# Altium PCB 红外发射.PcbDoc
Units mil, origin at the board's own origin, x right, y up, seen from the top; angles counter-clockwise.
Board outline 6000 x 4000 mil, 2 copper layers (Top Layer, Bottom Layer); 11 components, 11 nets, 33 pads, 1 vias.
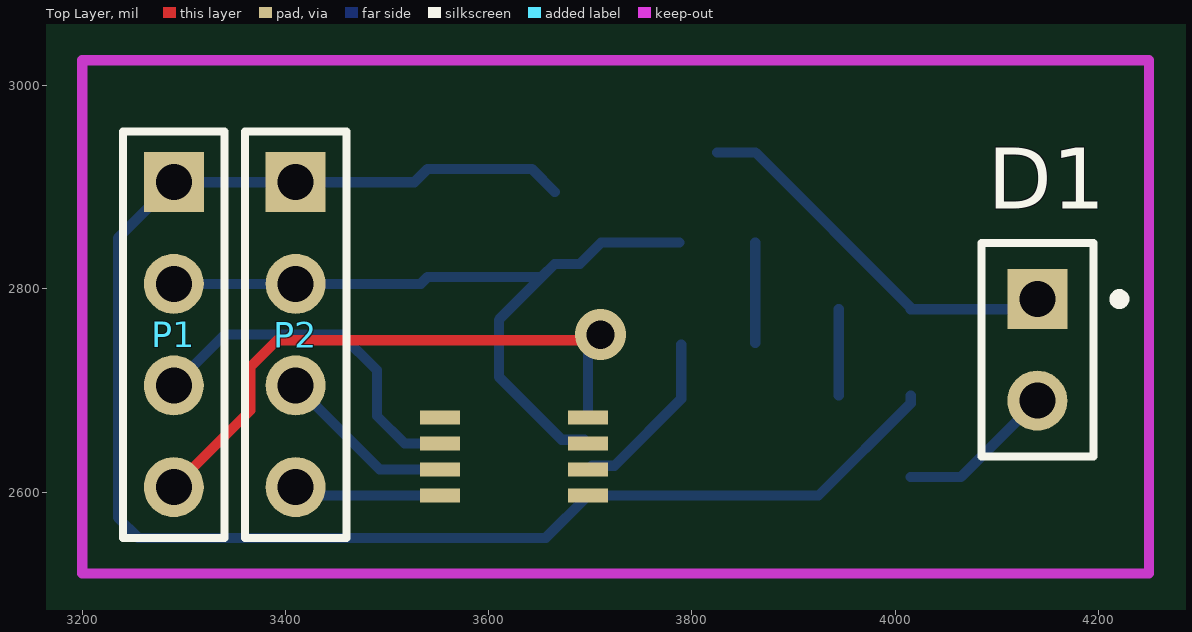
[diagram p0: Top Layer view]
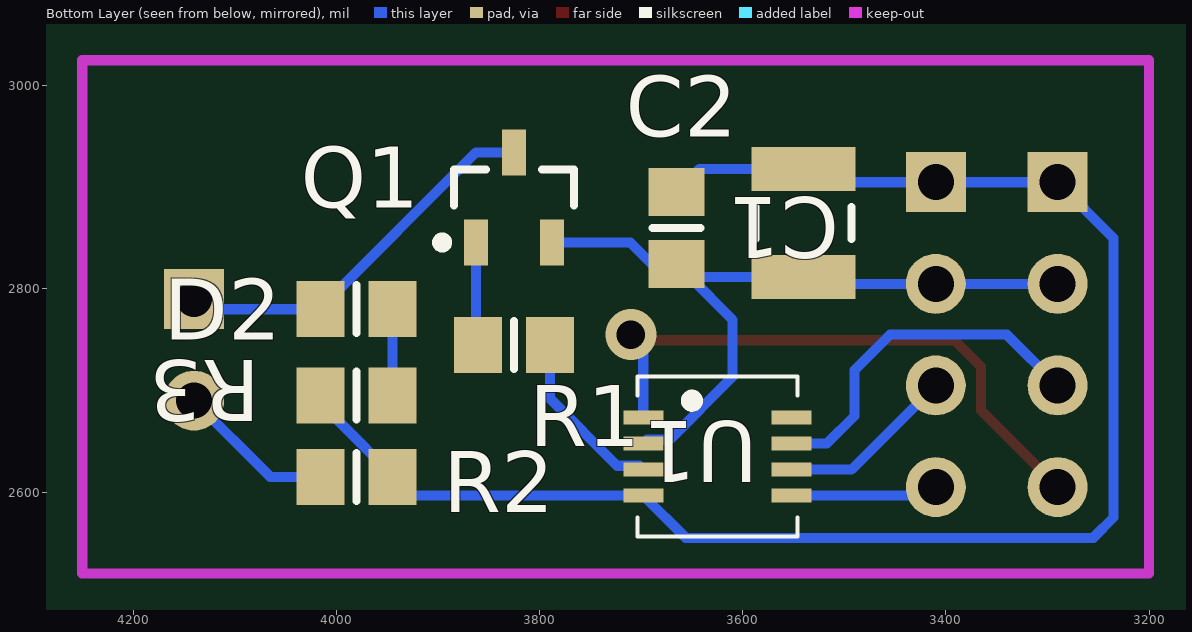
[diagram p1: Bottom Layer view, seen from below]

## Layer stack, top to bottom
Top Solder: solder mask 0.4, Solder Resist, Dk 3.5
Top Layer: signal copper 1.4
Dielectric 1: dielectric 12.6, FR-4, Dk 4.8
Bottom Layer: signal copper 1.4
Bottom Solder: solder mask 0.4, Solder Resist, Dk 3.5

## Board outline
1000,1000 7000,1000 7000,5000 1000,5000

## Design rules (kind name [scope] priority, off if disabled: settings)
Clearance [All] p1: gap=10
PolygonConnect [All] p1: connectstyle=Relief reliefconductorwidth=10 reliefentries=4 polygonreliefangle="90 Angle" airgapwidth=10
RoutingVias [All] p1: holewidth=28 width=50 viastyle="Through Hole" minholewidth=28 minwidth=50 maxholewidth=28 maxwidth=50
SolderMaskExpansion [All] p1: expansion=4
Width [All] p1: maxlimit=10 minlimit=10 preferedwidth=10
29 further rules are at their usual default settings.

## Components (designator, comment, footprint, x,y, rotation, side; value= is the part's Value field where it differs from the comment)
C1 "Cap2" C1210_L 3540,2865 r90 bottom
C2 "Cap" 6-0805_N 3665,2860 r270 bottom
D1 "IR" PIN2 4140,2790 r270 top
D2 "LED" 6-0805_N 3980,2780 r180 bottom
P1 "Header 4" HDR1X4 3290,2905 r270 top
P2 "Header 4" HDR1X4 3410,2905 r270 top
Q1 "8550" SOT-23_N 3825,2890 r90 bottom
R1 "Res1" 6-0805_N 3825,2745 r0 bottom
R2 "Res1" 6-0805_N 3980,2615 r180 bottom
R3 "Res1" 6-0805_N 3980,2695 r0 bottom
U1 "STC15F104W_SOP8" DFN8 3625,2635 r180 bottom

## Footprints (in the part's own frame and the unit in brackets; to place one, negate y for a bottom-side part, rotate by r counter-clockwise, add the part's x,y. Pads: shape width x height; smd on the part's side, far side on the other; paste and mask are expansions set on the pad)
6-0805_N [mm] "Chip Resistor, Body 2.0x1.2mm, IPC Medium Density"
  rect 1.2x1.4 smd: 1(-0.9,0) 2(0.9,0)
  silkscreen extent 0,-0.6 0,0.6, body extent -1.07,-0.7 1.07,0.7, height 0.7
C1210_L [mm] "Chip Capacitor, Body 3.2x2.5mm, IPC High Density"
  rect 1.1x2.6 smd: 1(-1.35,0) 2(1.35,0)
  silkscreen extent -0.4,-1.2 0.4,1.2, body extent -1.7,-1.35 1.7,1.35, height 1.5
DFN8 [mm]
  rect 1x0.35 all layers, no hole: 1(-1.85,0.975) 2(-1.85,0.325) 3(-1.85,-0.325) 4(-1.85,-0.975) 5(1.85,-0.975) 6(1.85,-0.325) 7(1.85,0.325) 8(1.85,0.975)
  silkscreen extent -2,-2 2,2
HDR1X4 [mm] "Connector; Header; 4 Position"
  rect 1.5x1.5 hole 0.9: 1(0,0)
  round 1.5 hole 0.9: 2(2.54,0) 3(5.08,0) 4(7.62,0)
  silkscreen extent -1.27,-1.27 8.89,1.27
PIN2 [mm] "Photosensitive Diode; 2 Leads"
  rect 1.5x1.5 hole 0.9: 1(0,0)
  round 1.5 hole 0.9: 2(2.54,0)
  silkscreen extent -1.4,-1.4 3.94,2.18
SOT-23_N [mm] "SOT23, 3-Leads, Body 2.9x1.3mm, Pitch 0.95mm, Lead Span 2.5mm, IPC Medium Density"
  rect 1.15x0.6 smd: 1(-1.125,0.95) 2(-1.125,-0.95) 3(1.125,0)
  silkscreen extent -1.25,-1.5 0.7,1.93, body extent -0.7,-1.5 0.7,1.5, height 1.1

## Part data
C1 C2: "Capacitor"
D1 D2: library part LED0, "Typical INFRARED GaAs LED"
P1 P2: "Header, 4-Pin"
Q1: library part 2N3906, "PNP General Purpose Amplifier"
R1 R2 R3: "Resistor"
U1: library part STC15F101W_SOP8_DIP8

## Via types
v1: diameter 50, hole 28, Top Layer to Bottom Layer, 1 vias

## Nets (pads, with @x,y where several pads share a name; then routed paths per layer and width w, separated by ;. In a path a pad name is that pad's centre, name@x,y a point inside that pad or via, vN(x,y) a via of type N, cw(c..) or ccw(c..) an arc to the next point about the centre after c; other vN are vias at no path point)
GND: C1.2 C2.1 P1.1 P2.1 R2.2 R3.2 U1.4 | length 1593.8
  Bottom Layer w10: C2.1 3642.28,2918.15 C1.2 3526.85,2905 P2.1 P1.1 3235,2850 3235,2575 3255,2555 3656.22,2555 U1.4 3924.65,2596.61 4015.43,2687.39 R3.2
IN1: P2.4 U1.5 | length 133.8
  Bottom Layer w10: P2.4@3418.39,2596.61 U1.5
IN2: P1.3 U1.7 | length 353.6
  Bottom Layer w10: P1.3 3340,2755 3455,2755 3490,2720 3490,2675 3517.2,2647.8 U1.7
IN3: P1.4 U1.1 | length 578.9
  Top Layer w10: P1.4 3365.47,2680.47 3365.47,2723.44 3391.56,2749.53 3704.53,2749.53 v1(3710,2755)
  Bottom Layer w10: U1.1 v1@3697.83,2745
IN4: P2.3 U1.6 | length 176.5
  Bottom Layer w10: P2.3 3492.8,2622.2 U1.6
NetD1_1: D1.1 D2.1 Q1.3 | length 383.9
  Bottom Layer w10: Q1.3 3862.67,2934.29 4015.43,2781.53 D2.1 4130,2780 D1.1
NetD1_2: D1.2 R2.1 | length 155.6
  Bottom Layer w10: R2.1 4065,2615 D1.2
NetD2_2: D2.2 R3.1 | length 85
  Bottom Layer w10: R3.1 D2.2
NetQ1_2: Q1.1 R1.2 | length 98.7
  Bottom Layer w10: R1.2@3862.4,2746.97 Q1.1
NetR1_1: R1.1 U1.3 | length 173.8
  Bottom Layer w10: U1.3 3701.54,2625.91 3723.73,2625.91 3789.57,2691.74 R1.1
VCC: C1.1 C2.2 P1.2 P2.2 Q1.2 U1.2 | length 745.4
  Bottom Layer w10: P1.2 P2.2 3533.15,2805 C1.1 C2.2@3652.28,2811.85 ; U1.2 3694.13,2651.5 3671.94,2651.5 3610,2713.43 3610,2769.57 C2.2@3652.28,2811.85 ; Q1.2 3710.71,2845.71 3689.57,2824.57 C2.2 C2.2@3652.28,2811.85
pads on no net: U1.8

## Keep-outs
Keep-Out Layer:
  lines w10: 3200,2520 4250,2520 4250,3025 3200,3025 3200,2520